# Altium PCB ecg-go_core_backup.PcbDoc
Units mm, origin at the board's own origin, x right, y up, seen from the top; angles counter-clockwise.
Board outline 37 x 40 mm, 2 copper layers (Top Layer, Bottom Layer), stack 1.071 mm thick; 67 components, 67 nets, 243 pads, 69 vias.
Unrouted connection lines stored in the file: 24.
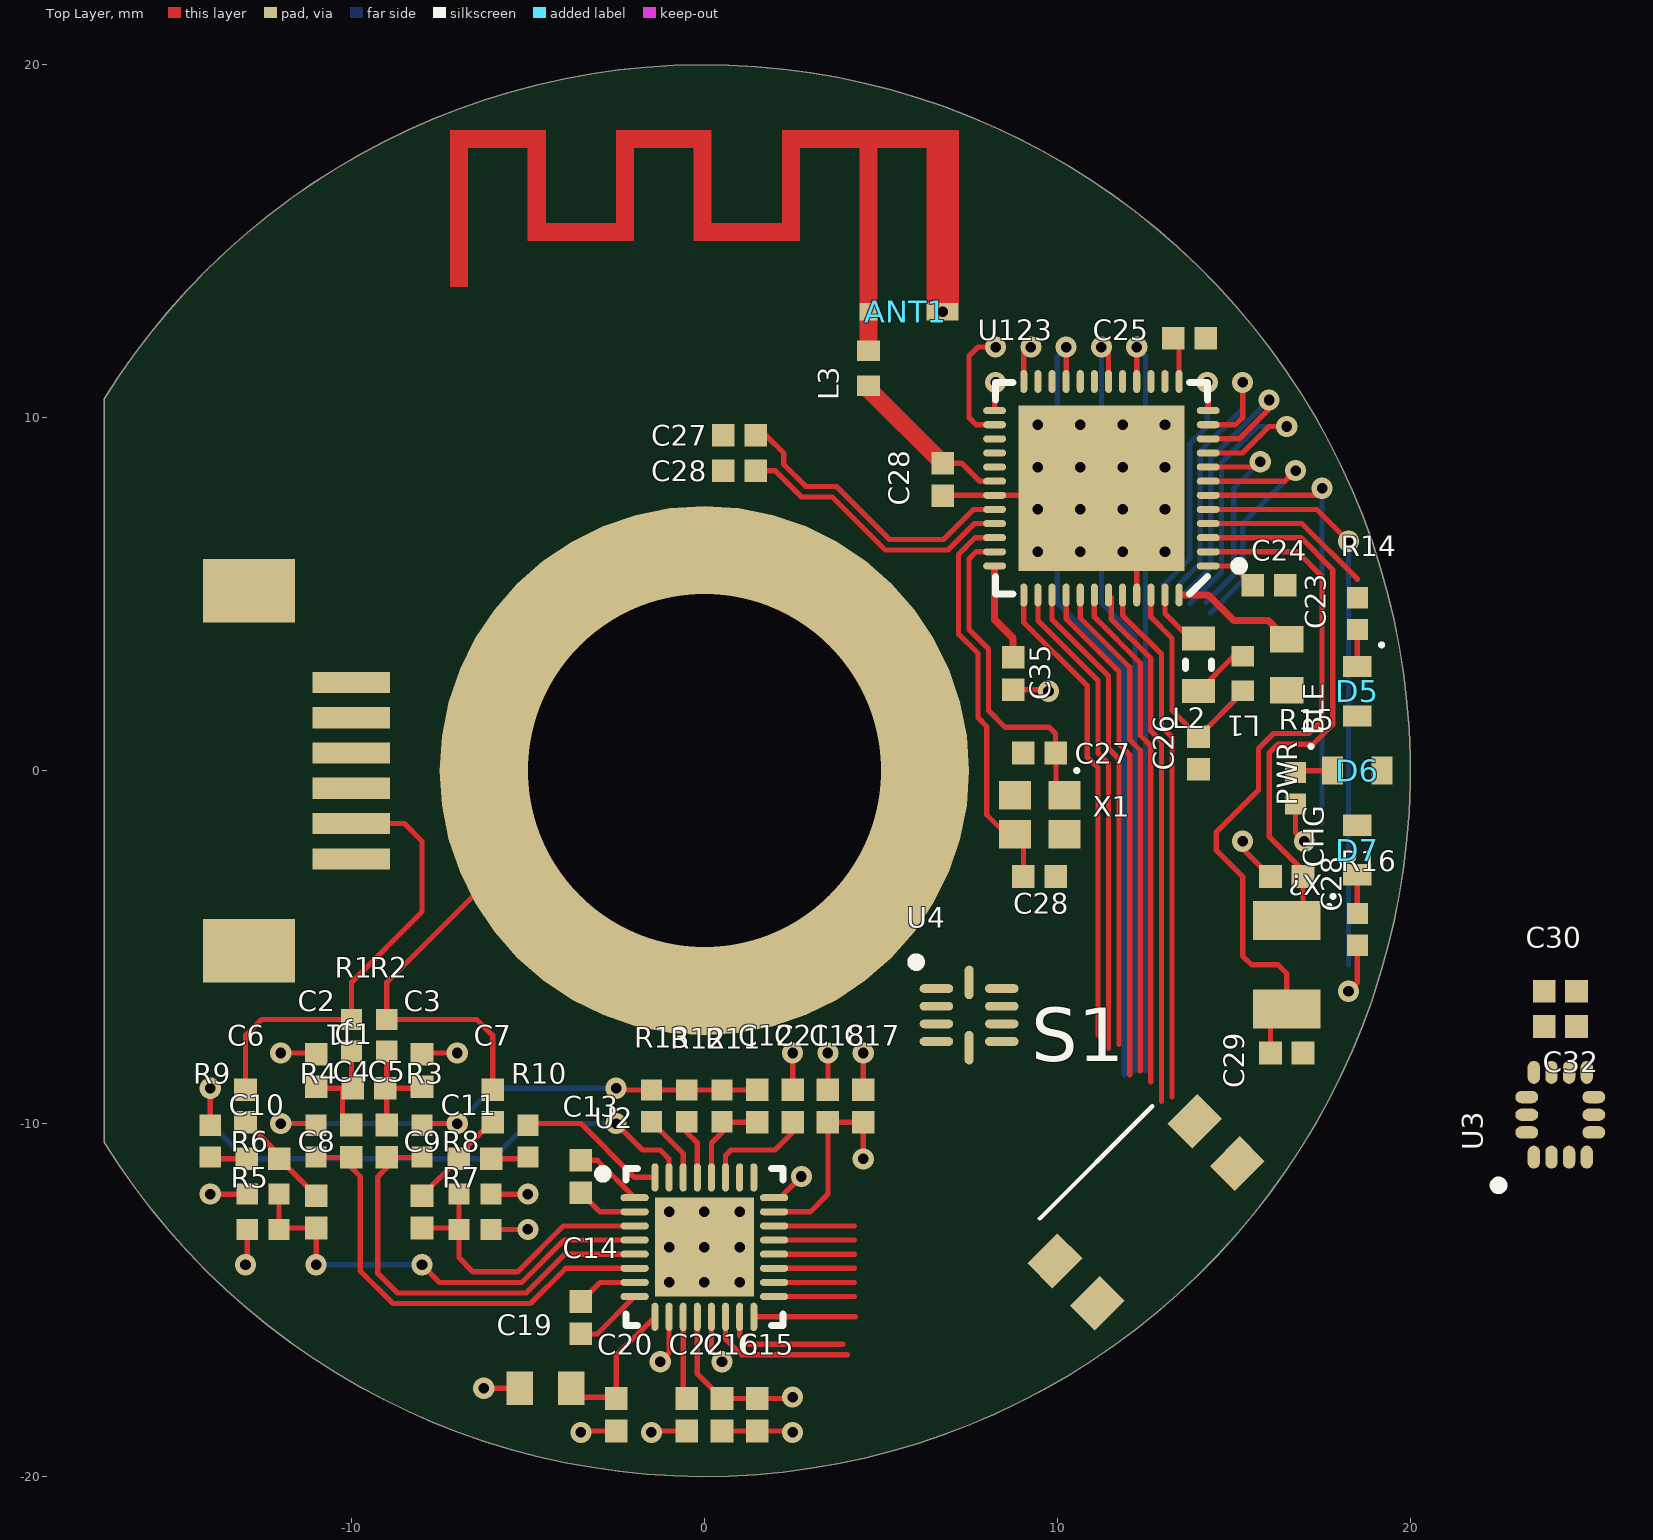
[diagram p0: Top Layer view]
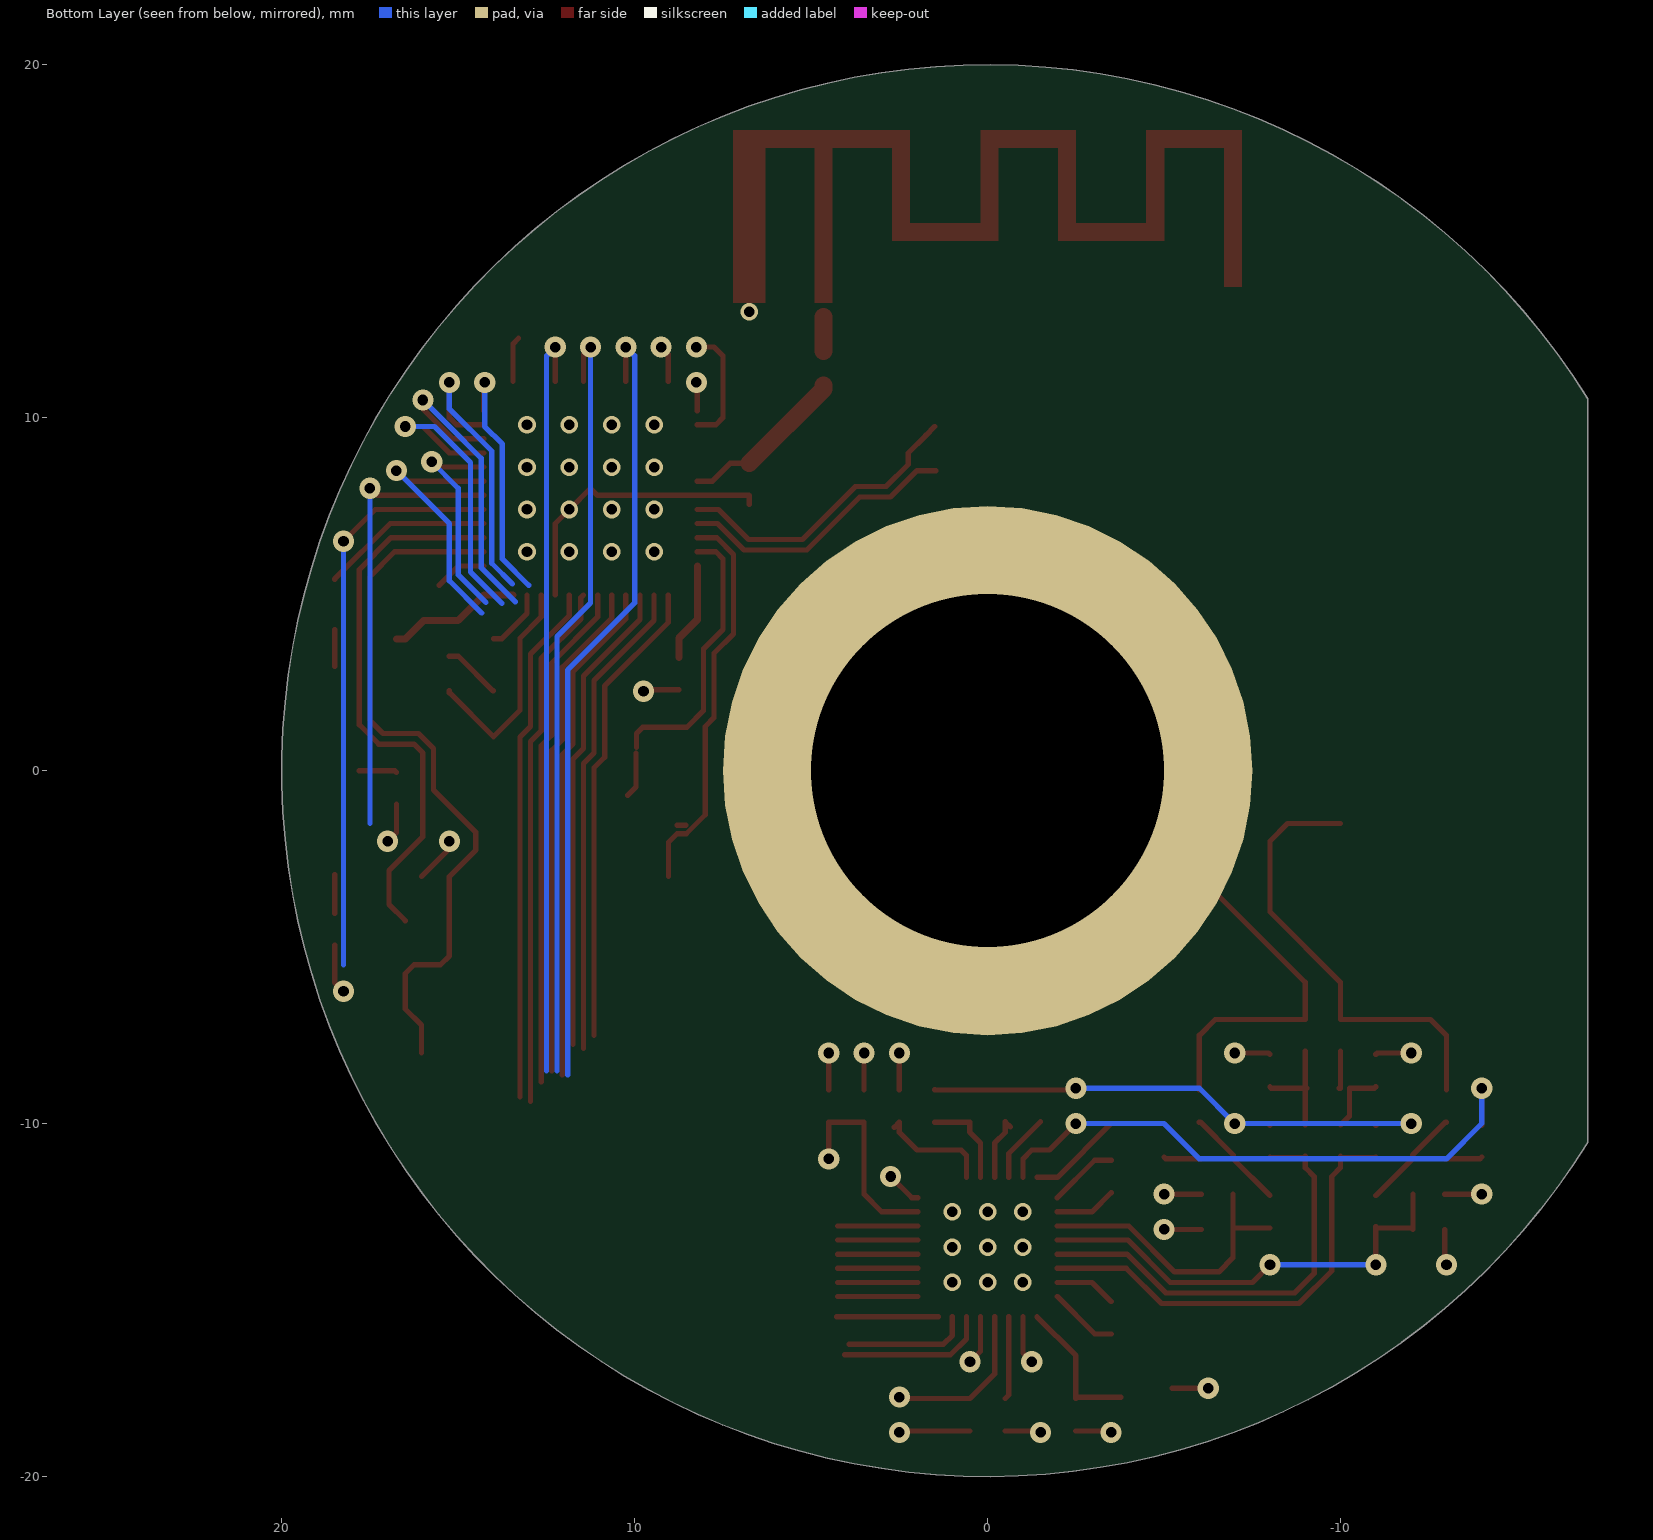
[diagram p1: Bottom Layer view, seen from below]
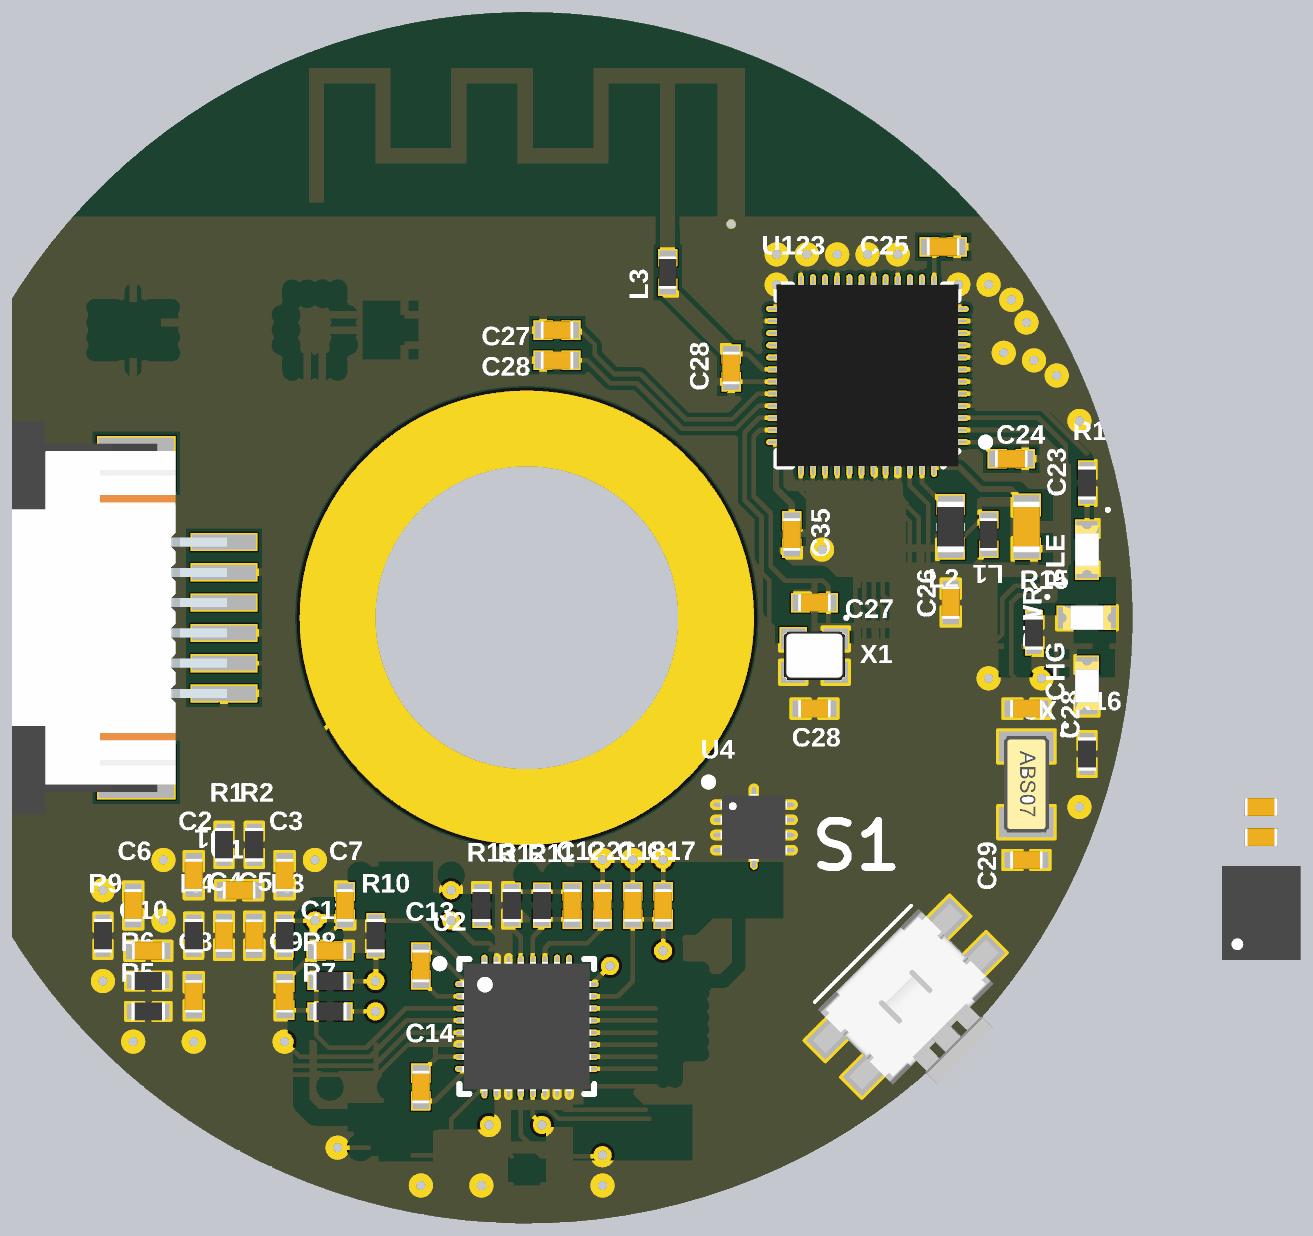
[diagram p2: 3D render of the assembled board from above, using the file's embedded part models]

## Layer stack, top to bottom
Top Solder: solder mask 0.0102, Solder Resist, Dk 3.5
Top Layer: signal copper 0.0356
Dielectric 1: dielectric 1, FR-4, Dk 4.8
Bottom Layer: signal copper 0.0356
Bottom Solder: solder mask 0.0102, Solder Resist, Dk 3.5

## Board outline
-17,-10.536 -17,10.536 cw(c0,0)

## Design rules (kind name [scope] priority, off if disabled: settings)
BoardOutlineClearance [All] p1: gap=0.15
Clearance [All] p1: gap=0.15
ComponentClearance [All] p1: gap=0.25 collisioncheckmode=3 verticalgap=0.25 showdistances=TRUE
HoleSize [All] p1: absolutevalues=TRUE maxlimit=6.3 minlimit=0.3 maxpercent=80.000 minpercent=20.000
ParallelSegment [All] p1: limit=254 gap=0.254
PolygonConnect PolygonConnectANT [HasFootprint('ANT2.4GHZ_MIFA')] p1: connectstyle=Direct reliefconductorwidth=0.254 reliefentries=4 polygonreliefangle="90 Angle" airgapwidth=0.254
PolygonConnect PolygonConnectVias [IsVia] p2: connectstyle=Direct reliefconductorwidth=0.254 reliefentries=4 polygonreliefangle="90 Angle" airgapwidth=0.254
PolygonConnect [All] p3: connectstyle=Relief reliefconductorwidth=0.25 reliefentries=4 polygonreliefangle="90 Angle" airgapwidth=0.15
RoutingVias [All] p1: holewidth=0.3 width=0.6 viastyle="Through Hole" minholewidth=0.3 minwidth=0.6 maxholewidth=6.3 maxwidth=10.6
SolderMaskExpansion [All] p1: expansion=0.1
Width [All] p1: maxlimit=10 minlimit=0.15 preferedwidth=0.25
28 further rules are at their usual default settings.

## Classes and differential pairs
component class U_interface: D5 D6 D7 D? R14 R15 R16 R? S1 U4 U?
component class U_afe: C1 C2 C3 C4 C5 C6 C7 C8 C9 C10 C11 C12 C13 C14 C15 C16 C17 C18 C19 C20 C21 C22 R1 R2 R3 R4 R5 R6 R7 R8 R9 R10 R11 R12 R13 U2
component class U_controller: ANT1 C23 C24 C25 C26 C27 C28 C29 C35 L1 L2 L3 U123 X1 X?
component class U_imu: C30 C32 U3
component class core: J1

## Components (designator, comment, footprint, x,y, rotation, side; value= is the part's Value field where it differs from the comment)
ANT1 "2.4 GHz" ANT2.4GHZ_MIFA 4.65,13.25 r180 top net-tie
C1 "2.2n" C0402 -9.5,-9 r0 top
C2 "100p" C0402 -11,-8.5 r90 top
C3 "100p" C0402 -8,-8.5 r270 top
C4 "1u" C0402 -10,-10.5 r270 top
C5 "1u" C0402 -9,-10.5 r270 top
C6 "0.1u" C0402 -13,-9.5 r90 top
C7 "0.1u" C0402 -6,-9.5 r270 top
C8 "2.2n" C0402 -11,-12.5 r90 top
C9 "2.2n" C0402 -8,-12.5 r90 top
C10 "2.2n" C0402 -12.5,-11 r0 top
C11 "2.2n" C0402 -6.5,-11 r0 top
C12 "1.5n" C0402 1.5,-9.5 r270 top
C13 "4.7n" C0402 -3.5,-11.5 r90 top
C14 "4.7n" C0402 -3.5,-15.5 r90 top
C15 "1u" C0402 1.5,-18.25 r90 top
C16 "0.1u" C0402 0.5,-18.25 r90 top
C17 "1u" C0402 4.5,-9.5 r270 top
C18 "0.1u" C0402 3.5,-9.5 r270 top
C19 "10u" C0603 -4.5,-17.5 r0 top
C20 "0.1u" C0402 -2.5,-18.25 r90 top
C21 "1u" C0402 2.5,-9.5 r270 top
C22 "1u" C0402 -0.5,-18.25 r90 top
C23 "4.7u" C0603 16.5,3 r90 top
C24 "100n" C0402 16,5.25 r180 top
C25 "100n" C0402 13.75,12.25 r180 top
C26 "1u" C0402 14,0.5 r90 top
C27 "12p" C0402 9.5,0.5 r0 top
C27 "100p" C0402 1,9.5 r0 top
C28 "0.8p" C0402 6.75,8.25 r270 top
C28 "12p" C0402 16.5,-3 r0 top
C28 "12p" C0402 9.5,-3 r180 top
C28 "100p" C0402 1,8.5 r0 top
C29 "12p" C0402 16.5,-8 r180 top
C30 "0.1u" C0402 24.25,-6.25 r180 top
C32 "0.1u" C0402 24.25,-7.25 r180 top
C35 "100n" C0402 8.75,2.75 r90 top
D5 "BLE" "WL-SMCW 0603" 18.5,2.25 r270 top
D6 "PWR" "WL-SMCW 0603" 18.5,0 r0 top
D7 "CHG" "WL-SMCW 0603" 18.5,-2.25 r90 top
J1 "FFC Conn" WE68610614122 -17,0 r270 top
L1 "15n" L0402 15.25,2.75 r270 top
L2 "10u" L0603 14,3 r270 top
L3 "3.9n" L0402 4.65,11.4 r90 top
R1 "40.2k" R0402 -10,-7.5 r90 top
R2 "40.2k" R0402 -9,-7.5 r90 top
R3 "4.7M" R0402 -8,-10.5 r270 top
R4 "4.7M" R0402 -11,-10.5 r270 top
R5 "10M" R0402 -12.5,-13 r180 top
R6 "10M" R0402 -12.5,-12 r180 top
R7 "10M" R0402 -6.5,-13 r0 top
R8 "10M" R0402 -6.5,-12 r0 top
R9 "40.2k" R0402 -14,-10.5 r270 top
R10 "40.2k" R0402 -5,-10.5 r270 top
R11 "1M" R0402 0.5,-9.5 r270 top
R12 "0" R0402 -0.5,-9.5 r270 top
R13 "0" R0402 -1.5,-9.5 r90 top
R14 "1k" R0402 18.5,4.45 r270 top
R15 "4.7k" R0402 16.75,-0.5 r90 top
R16 "4.7k" R0402 18.5,-4.5 r90 top
S1 "WE434351045816" WE434351045816 13.75,-13.75 r45 top
U2 "ADS1292R" ADS129X_QFN 0,-13.5 r0 top
U3 "LSM6DS3" LSM6DS3 24.25,-9.75 r90 top
U4 "DRV2603" DRV2603 7.5,-6.925 r0 top
U123 "nRF52832-QFAA" QFN40P600X600X90-48N 11.25,8 r180 top
X1 "32 MHz" CX2016DB32000D0FLJCC 9.5,-1.25 r180 top
X? "32.768 kHz" ABS07-32.768KHZ-9-T 16.5,-5.5 r270 top

## Footprints (in the part's own frame and the unit in brackets; to place one, negate y for a bottom-side part, rotate by r counter-clockwise, add the part's x,y. Pads: shape width x height; smd on the part's side, far side on the other; paste and mask are expansions set on the pad)
ABS07-32.768KHZ-9-T [mm] "Crystal - 32.768 kHz, 9 pF, 70 kOhm"
  rect 1.1x1.9 smd paste-0.05 mask+0.05: 1(-1.25,0) 2(1.25,0)
  silkscreen extent -1.7,1.15 -1.6,1.25, body extent -1.6,-0.75 1.6,0.75, height 0.88
ADS129X_QFN [mm] "QFN, 32-Leads, Body 4,00x4,00mm, Pitch 0,40mm, Thermal Pad 2,80x2,80mm, IPC Medium Density"
  oval 0.8x0.2 smd paste-0.04 mask+0.05: 1(-1.975,1.4) 2(-1.975,1) 3(-1.975,0.6) 4(-1.975,0.2) 5(-1.975,-0.2) 6(-1.975,-0.6) 7(-1.975,-1) 8(-1.975,-1.4) 17(1.975,-1.4) 18(1.975,-1) 19(1.975,-0.6) 20(1.975,-0.2) 21(1.975,0.2) 22(1.975,0.6) 23(1.975,1) 24(1.975,1.4)
  oval 0.2x0.8 smd paste-0.04 mask+0.05: 9(-1.4,-1.975) 10(-1,-1.975) 11(-0.6,-1.975) 12(-0.2,-1.975) 13(0.2,-1.975) 14(0.6,-1.975) 15(1,-1.975) 16(1.4,-1.975) 25(1.4,1.975) 26(1,1.975) 27(0.6,1.975) 28(0.2,1.975) 29(-0.2,1.975) 30(-0.6,1.975) 31(-1,1.975) 32(-1.4,1.975)
  rect 2.8x2.8 smd paste-2.8 mask+0.05: 33(0,0)
  silkscreen extent -3,-2.22 2.22,2.22, body extent -2.12,-2.12 2.12,2.12, height 1
ANT2.4GHZ_MIFA [mm] "Antenna - Meandered Inverted F Antenna (IFA)"
  rect 0.5x0.5 smd paste-0.5: 1(0,0.25)
  rect 0.9x0.5 smd paste-0.9: 2(-2.1,0.25)
  Top Layer region: -2.55,0 -2.55,-4.9 2.45,-4.9 2.45,-2.26 4.45,-2.26 4.45,-4.9 7.15,-4.9 7.15,-2.26 9.15,-2.26 9.15,-4.9 11.85,-4.9 11.85,-0.46 11.35,-0.46 11.35,-4.4 9.65,-4.4 9.65,-1.76 6.65,-1.76 6.65,-4.4 4.95,-4.4 4.95,-1.76 1.95,-1.76 1.95,-4.4 0.25,-4.4 0.25,0 -0.25,0 -0.25,-4.4 -1.65,-4.4 -1.65,0
C0402 [mm] "Chip Capacitor, 2-Leads, Body 1,00x0,50mm, IPC Medium Density"
  rect 0.64x0.64 smd paste-0.05 mask+0.05: 1(-0.46,0) 2(0.46,0)
  body extent -0.55,-0.3 0.55,0.3, height 0.4
C0603 [mm] "Chip Capacitor, 2-Leads, Body 1,60x0,80mm, IPC Medium Density"
  rect 0.75x0.95 smd paste-0.05 mask+0.05: 1(-0.725,0) 2(0.725,0)
  body extent -0.85,-0.45 0.85,0.45, height 0.5
CX2016DB32000D0FLJCC [mm] "Crystal - 32 MHz, 8 pF, 80 ohm"
  rect 0.9x0.8 smd paste-0.05 mask+0.05: 1(-0.7,-0.55) 2(0.7,-0.55) 3(0.7,0.55) 4(-0.7,0.55)
  silkscreen extent -1.1,-1.3 -1,-1.2, body extent -1.02,-0.82 1.03,0.83, height 0.39
DRV2603 [mm] "IC - Haptic Drive, ERM/LRA, Auto Resonance"
  oval 0.95x0.25 smd paste-0.05 mask+0.05: 1(-0.925,0.75) 2(-0.925,0.25) 3(-0.925,-0.25) 4(-0.925,-0.75) 6(0.925,-0.75) 7(0.925,-0.25) 8(0.925,0.25) 9(0.925,0.75)
  oval 0.25x0.95 smd paste-0.05 mask+0.05: 5(0,-0.925) 10(0,0.925)
  silkscreen extent -1.62,1.38 -1.37,1.62, body extent -1.1,-1.1 1.1,1.1, height 0.8
L0402 [mm] "Chip Inductor, 2-Leads, Body 1,00x0,50mm, IPC Medium Density"
  rect 0.58x0.64 smd paste-0.05 mask+0.05: 1(-0.49,0) 2(0.49,0)
  body extent -0.55,-0.3 0.55,0.3, height 0.4
L0603 [mm] "Chip Inductor, 2-Leads, Body 1,60x0,80mm, IPC Medium Density"
  rect 0.68x0.94 smd paste-0.05 mask+0.05: 1(-0.74,0) 2(0.74,0)
  silkscreen extent -0.1,-0.37 0.1,0.37, body extent -0.85,-0.45 0.85,0.45, height 0.5
LSM6DS3 [mm] "IC - Inertial Measurement Unit, Accelerometer, Gyroscope, 6D"
  oval 0.65x0.35 smd paste-0.05 mask+0.025: 1(-1.2,0.75) 2(-1.2,0.25) 3(-1.2,-0.25) 4(-1.2,-0.75) 8(1.2,-0.75) 9(1.2,-0.25) 10(1.2,0.25) 11(1.2,0.75)
  oval 0.35x0.65 smd paste-0.05 mask+0.025: 5(-0.5,-0.95) 6(0,-0.95) 7(0.5,-0.95) 12(0.5,0.95) 13(0,0.95) 14(-0.5,0.95)
  silkscreen extent -2.12,1.63 -1.88,1.87, body extent -1.55,-1.3 1.55,1.3, height 0.86
QFN40P600X600X90-48N [mm]
  oval 0.65x0.2 smd paste-0.05 mask+0.05: 1(-3.025,2.2) 2(-3.025,1.8) 3(-3.025,1.4) 4(-3.025,1) 5(-3.025,0.6) 6(-3.025,0.2) 7(-3.025,-0.2) 8(-3.025,-0.6) 9(-3.025,-1) 10(-3.025,-1.4) 11(-3.025,-1.8) 12(-3.025,-2.2) 25(3.025,-2.2) 26(3.025,-1.8) 27(3.025,-1.4) 28(3.025,-1) 29(3.025,-0.6) 30(3.025,-0.2) 31(3.025,0.2) 32(3.025,0.6) 33(3.025,1) 34(3.025,1.4) 35(3.025,1.8) 36(3.025,2.2)
  oval 0.2x0.65 smd paste-0.05 mask+0.05: 13(-2.2,-3.025) 14(-1.8,-3.025) 15(-1.4,-3.025) 16(-1,-3.025) 17(-0.6,-3.025) 18(-0.2,-3.025) 19(0.2,-3.025) 20(0.6,-3.025) 21(1,-3.025) 22(1.4,-3.025) 23(1.8,-3.025) 24(2.2,-3.025) 37(2.2,3.025) 38(1.8,3.025) 39(1.4,3.025) 40(1,3.025) 41(0.6,3.025) 42(0.2,3.025) 43(-0.2,3.025) 44(-0.6,3.025) 45(-1,3.025) 46(-1.4,3.025) 47(-1.8,3.025) 48(-2.2,3.025)
  rect 4.7x4.7 smd paste-0.05 mask+0.05: 49(0,0)
  silkscreen extent -4.03,-3 3,3, body extent -3.02,-3.02 3.02,3.02, height 0.86
R0402 [mm] "Chip Resistor, 2-Leads, Body 1,00x0,50mm, IPC Medium Density"
  rect 0.6x0.6 smd paste-0.05 mask+0.05: 1(-0.45,0) 2(0.45,0)
  body extent -0.55,-0.3 0.55,0.3, height 0.4
WE68610614122 [mm] "Conn - FFC, 6 Pin, Top Contacts, SMD, Right Angle, Slide Lock"
  rect 0.6x2.2 smd paste-0.05 mask+0.05: 1(-2.5,7) 2(-1.5,7) 3(-0.5,7) 4(0.5,7) 5(1.5,7) 6(2.5,7)
  rect 1.8x2.6 smd paste-0.05 mask+0.05: ""(-5.1,4.1) ""(5.1,4.1)
  body extent -6.5,0 6.5,7.1, height 3.01
WE434351045816 [mm] "Switch - Tactile, Off-Mom, SPST, Side-Actuated"
  rect 1.2x1 smd paste-0.05 mask+0.05: 1(2.8,2.6) 2(2.8,0.9) 3(-2.8,2.6) 4(-2.8,0.9)
  silkscreen extent -2.25,3.75 2.25,3.75, body extent -3.2,-1 3.2,3.5, height 1.64
"WL-SMCW 0603" [mm] "Chip Diode, 2-Leads, Body 1,60x0,80mm, IPC Medium Density"
  rect 0.6x0.8 smd paste-0.05 mask+0.05: 1(-0.7,0) 2(0.7,0)
  silkscreen extent -1.36,0.64 -1.26,0.74, body extent -0.8,-0.4 0.8,0.4, height 0.7

## Part data
ANT1: library part "Antenna 2.4 GHz", "Antenna - Meandered Inverted F Antenna (IFA)"
C1 C2 C3 C4 C5 C6 C7 C8 C9 C10 C11 C12 C13 C14 C15 C16 C17 C18 C19 C20 C21 C22 C23 C24 C25 C26 C27 C27 C28 C28 C28 C28 C29 C30 C32 C35: library part Capacitor, "Capacitor"
D5: library part 150060BS75000, "LED - Blue, 3.2V, 0603"
D6: library part 150060VS75000, "LED - Green, 2V, 0603"
D7: library part 150060YS75000, "LED - Yellow, 2V, 0603"
J1: library part WE68610614122, "Conn - FFC, 6 Pin, Top Contacts, SMD, Right Angle, Slide Lock"
L1 L2 L3: library part Inductor, "Inductor"
R1 R2 R3 R4 R5 R6 R7 R8 R9 R10 R11 R12 R13 R14 R15 R16: library part Resistor, "Resistor"
S1: "Switch - Tactile, Off-Mom, SPST, Side-Actuated"
U2: "IC - Analog Front End - Medical"
U3: "IC - Inertial Measurement Unit, Accelerometer, Gyroscope, 6D"
U4: "IC - Haptic Drive, ERM/LRA, Auto Resonance"
U123: "Multi-protocol Bluetooth Low Energy, ANT and 2.4GHz proprietary system-on-chip"
X1: library part CX2016DB32000D0FLJCC, "Crystal - 32 MHz, 8 pF, 80 ohm"
X?: library part ABS07-32.768KHZ-9-T, "Crystal - 32.768 kHz, 9 pF, 70 kOhm"

## Free pads (board coordinates)
  round 15 hole 10: ""(0,0)

## Via types
v1: diameter 0.6, hole 0.3, Top Layer to Bottom Layer, 43 vias
v2: diameter 0.5, hole 0.3, Top Layer to Bottom Layer, 25 vias
v3: diameter 0.5, hole 0.3, Top Layer to Bottom Layer, tented both sides, 1 vias

## Nets (pads, with @x,y where several pads share a name; then routed paths per layer and width w, separated by ;. In a path a pad name is that pad's centre, name@x,y a point inside that pad or via, vN(x,y) a via of type N, cw(c..) or ccw(c..) an arc to the next point about the centre after c; other vN are vias at no path point)
AFE_CLK: U2.17 | length 2.3
  Top Layer w0.15: U2.17 4.25,-14.9
AFE_CLKSEL: U2.14 | length 4.3
  Top Layer w0.15: U2.14 0.6,-16.1 1.05,-16.55 4.049,-16.55
AFE_CS: U2.18 | length 2.3
  Top Layer w0.15: U2.18 4.25,-14.5
AFE_DIN: U2.19 | length 2.3
  Top Layer w0.15: U2.19 4.25,-14.1
AFE_DOUT: U2.21 | length 2.3
  Top Layer w0.15: U2.21 4.25,-13.3
AFE_DRDY: U2.22 | length 2.3
  Top Layer w0.15: U2.22 4.25,-12.9
AFE_ECG_BIAS: C12.1 R3.1 R4.1 R11.1 R12.1 R13.2 | length 16
  Top Layer w0.15: v1(-12,-10) -11.05,-10 R4.1 ; R3.1 -7.95,-10 v1(-7,-10) ; v1(-2.5,-9) -2.45,-9.05 R13.2 R12.1 R11.1 1.49,-9.05 C12.1
  Bottom Layer w0.15: v1(-12,-10) v1(-7,-10) -6,-9 v1(-2.5,-9)
AFE_ELEC_LA: C7.1 pad. R2.2 | length 17.2
  Top Layer w0.15: R2.2 -6.45,-7.05 -6,-7.5 C7.1 ; R2.2@-9,-7.01 -9,-6 -3,0 pad.
AFE_ELEC_RA: C6.2 J1.5 R1.2 | length 12.8
  Top Layer w0.15: C6.2 -13,-7.5 -12.55,-7.05 R1.2 ; R1.2@-10,-7.01 -10,-6 -8,-4 -8,-2 -8.5,-1.5 J1.5
AFE_GPIO1: U2.26
AFE_GPIO2: U2.25
AFE_RESET: U2.15 | length 3.6
  Top Layer w0.15: U2.15 1,-16 1.25,-16.25 3.924,-16.25
AFE_RESP_BIAS_N: C9.1 R7.1 R8.1 U2.3 | length 8.5
  Top Layer w0.15: C9.1 -6.99,-12.96 R7.1 ; R8.1 R7.1 ; U2.3 -3.999,-12.9 -5.299,-14.2 -6.55,-14.2 -6.95,-13.8 R7.1
AFE_RESP_BIAS_P: C8.1 R5.1 R6.1 U2.4 | length 12.9
  Top Layer w0.15: R6.1 R5.1 -12.01,-12.96 C8.1 ; v1(-11,-14) C8.1 ; C8.1@-11,-12.92 C8.1 ; v1(-8,-14) -7.5,-14.5 -5.174,-14.5 -3.974,-13.3 U2.4
  Bottom Layer w0.15: v1(-11,-14) v1(-8,-14)
AFE_SCLK: U2.20 | length 2.3
  Top Layer w0.15: U2.20 4.25,-13.7
AFE_START: U2.16 | length 2.9
  Top Layer w0.15: U2.16 4.275,-15.475
AFE_VCAP1: C22.2 U2.11 | length 2.4
  Top Layer w0.15: U2.11 -0.6,-17.69 C22.2
AFE_VCAP2: C21.2 U2.27 | length 3.3
  Top Layer w0.15: U2.27 0.6,-10.9 0.75,-10.75 2,-10.75 2.5,-10.25 C21.2 C21.2@2.645,-10.105
AFE_VREFP: C19.2 C20.2 U2.9 | length 4.1
  Top Layer w0.15: C19.2@-3.775,-17.75 -2.54,-17.75 C20.2 -2.5,-16.575 U2.9
AGND: C2.2 C3.1 C15.1 C16.1 C17.1 C18.1 C19.1 C20.1 C21.1 C22.1 R6.2 R8.2 U2.10 U2.13 U2.24 | length 16.1
  Top Layer w0.15: v1(-14,-12) R6.2 ; v1(-12,-8) -11.04,-8 C2.2 ; C3.1 -7.96,-8 v1(-7,-8) ; v1(-6.25,-17.5) C19.1 ; R8.2 v1(-5,-12) ; v1(-3.5,-18.75) -3.46,-18.71 C20.1 ; v1(-1.5,-18.75) -1.46,-18.71 C22.1 ; v1(-1.25,-16.75) -1,-16.5 U2.10 ; U2.13 0.2,-16.45 v1(0.5,-16.75) ; C16.1 C15.1 2.46,-18.71 v1(2.5,-18.75) ; U2.24 2.15,-12.1 v1(2.75,-11.5) ; C21.1 v1(2.5,-8) ; C18.1 v1(3.5,-8) ; C17.1 v1(4.5,-8)
CTRL_ANT_FEED: ANT1.1 L3.2 | length 1
  Top Layer w0.5: L3.2 ANT1.1@4.65,12.85
CTRL_CHRG_STAT: J1.3
CTRL_DCC: L2.1 U123.47 | length 1.8
  Top Layer w0.15: U123.47 13.05,4.45 13.76,3.74 L2.1
CTRL_DEC1: C24.2 U123.1 | length 1.5
  Top Layer w0.15: U123.1 14.99,5.8 C24.2
CTRL_DEC2: C27.2@1.46,9.5 U123.32 | length 8.6
  Top Layer w0.15: C27.2@1.5,9.75 1.75,9.5 2.25,9 2.25,8.674 2.874,8.05 3.749,8.05 5.25,6.549 6.776,6.549 7.627,7.4 U123.32
CTRL_DEC3: C28.2@1.46,8.5 U123.33 | length 8
  Top Layer w0.15: C28.2@1.46,8.5 2,8.5 2.75,7.75 3.624,7.75 5.126,6.249 6.9,6.249 7.651,7 U123.33
CTRL_DEC4: C26.2 L1.2 U123.46 | length 6.4
  Top Layer w0.15: U123.46 12.65,4.35 13.25,3.75 13.25,1.71 C26.2 15.25,2.21 L1.2
CTRL_SWDCLK: U123.25 | length 0.8
  Top Layer w0.15: U123.25 8.225,10.975 v1(8.25,11)
CTRL_SWDIO: U123.26 | length 3.4
  Top Layer w0.15: U123.26 7.7,9.8 7.5,10 7.5,11.75 7.75,12 v1(8.25,12)
CTRL_XC1: C28.2@9.04,-3 U123.34 X1.3 | length 11.5
  Top Layer w0.15: U123.34 7.676,6.6 7.2,6.124 7.2,3.876 7.75,3.326 7.75,1.5 8,1.25 8,-1.25 8.54,-1.79 8.8,-1.79 9.04,-2.03 C28.2@9.04,-3 ; X1.3@8.55,-1.55 X1.3@8.8,-1.55
CTRL_XC2: C27.2@9.96,0.5 U123.35 X1.1 | length 9.2
  Top Layer w0.15: U123.35 7.7,6.2 7.5,6 7.5,4 8.05,3.45 8.05,1.7 8.525,1.225 9.775,1.225 9.95,1.05 C27.2@9.95,0.655 ; C27.2@9.96,0.5 9.96,-0.46 X1.1
CTRL_XL1: C29.2 U123.2 X?.2 | length 20.3
  Top Layer w0.15: U123.2 16.8,6.2 17.5,5.5 17.5,1.424 17.126,1.05 16.126,1.05 15.7,0.624 15.7,-0.55 14.5,-1.75 14.5,-2.25 15.25,-3 15.25,-5.25 15.5,-5.5 16.25,-5.5 16.5,-5.75 X?.2 16.04,-7.21 C29.2
CTRL_XL2: C28.2@16.96,-3 U123.3 X?.1 | length 15.8
  Top Layer w0.15: U123.3 16.9,6.6 17.8,5.7 17.8,1.3 17.25,0.75 16.25,0.75 16,0.5 16,-1.87 16.96,-2.83 16.96,-3 16.96,-3.79 X?.1
GND: ANT1.2 C23.1 C24.1 C25.1 C26.1 C27.1 C28.1@0.54,8.5 C28.1@9.96,-3 C28.1@16.04,-3 C28.2@6.75,7.79 C29.1 C30.1 C32.1 C35.1 J1.2 J1.4 J1.6 S1.1 S1.3 U3.2 U3.3 U3.6 U3.7 U4.5 U4.8 U4.10 U123.31 U123.45 U123.49 X1.2 X1.4 | length 10.6
  Top Layer w0.15: C28.2@6.75,7.54 6.75,7.79 6.76,7.8 U123.31 11.05,7.8 U123.49 v2(11.85,7.4) 12.25,7 U123.45 ; C35.1 9.71,2.29 v1(9.75,2.25) ; v1(15.25,-2) 15.25,-2.21 C28.1@16.04,-3
  other v2: 9.45,6.2 10.65,6.2 11.85,6.2 13.05,6.2 9.45,7.4 10.65,7.4 13.05,7.4 9.45,8.6 10.65,8.6 11.85,8.6 13.05,8.6 9.45,9.8 10.65,9.8 11.85,9.8 13.05,9.8
  other v3: 6.75,13
IMU_INT1: U3.4
IMU_INT2: U3.9
NetC1_1: C1.1 C2.1 C4.1 R1.1 | length 3
  Top Layer w0.15: C2.1 -10.96,-9 -10.25,-9 -10.25,-9.79 C4.1 ; R1.1 -10,-9 C1.1
NetC1_2: C1.2 C3.2 C5.1 R2.1 | length 3.2
  Top Layer w0.15: C5.1 -9,-9.04 C1.2 ; R2.1 -9,-8.96 C1.2 ; C3.2 -8.04,-9 C1.2
NetC4_2: C4.2 R4.2 U2.6 | length 12.9
  Top Layer w0.15: R4.2 -10.99,-10.96 C4.2 ; C4.2@-10,-10.92 C4.2 ; U2.6 -3.926,-14.1 -4.926,-15.1 -8.824,-15.1 -9.75,-14.174 -9.75,-11.5 -10,-11.25 C4.2
NetC5_2: C5.2 R3.2 U2.5 | length 12.4
  Top Layer w0.15: C5.2@-9,-10.92 C5.2 ; R3.2 -8.01,-10.96 C5.2 ; U2.5 -3.95,-13.7 -5.05,-14.8 -8.7,-14.8 -9.25,-14.25 -9.25,-11.5 -9,-11.25 C5.2
NetC6_1: C6.1 C8.2 C10.2 | length 2.9
  Top Layer w0.15: C6.1 -12.971,-9.96 -12.04,-10.891 C10.2 C8.2
NetC7_2: C7.2 C9.2 C11.1 | length 2.9
  Top Layer w0.15: C9.2 C11.1 -6.96,-10.891 -6.029,-9.96 C7.2
NetC10_1: C10.1 R9.2 | length 1.1
  Top Layer w0.15: R9.2 -13.95,-11 C10.1
NetC11_2: C11.2 R10.2 | length 1.1
  Top Layer w0.15: C11.2 -5.05,-11 R10.2
NetC12_2: C12.2 R11.2 U2.28 | length 2.7
  Top Layer w0.15: U2.28 0.2,-10.55 0.51,-10.24 0.51,-9.96 C12.2
NetC13_1: C13.1 U2.2 | length 1.7
  Top Layer w0.15: C13.1 -2.96,-12.5 U2.2
NetC13_2: C13.2 U2.1 | length 2
  Top Layer w0.15: C13.2 -3.035,-11.04 U2.1
NetC14_1: C14.1 U2.8 | length 2
  Top Layer w0.15: C14.1 -3.035,-15.96 U2.8
NetC14_2: C14.2 U2.7 | length 1.7
  Top Layer w0.15: C14.2 -2.96,-14.5 U2.7
NetC23_2: C23.2 U123.48 | length 3.8
  Top Layer w0.2: U123.48 14.275,4.975 15,4.25 15.975,4.25 C23.2 C23.2@16.75,3.725
NetC25_2: C25.2 U123.13 | length 1.3
  Top Layer w0.15: C25.2 13.45,12.09 U123.13
NetC28_1: C28.1@6.75,8.71 L3.1 U123.30 | length 4.8
  Top Layer w0.15: C28.1@6.75,8.71 7.29,8.71 7.8,8.2 U123.30
  Top Layer w0.5: L3.1 4.65,10.81 C28.1@6.75,8.71
NetC30_2: C30.2 U3.8
NetC32_2: C32.2 U3.5
NetC35_2: C35.2 U123.36 | length 2.8
  Top Layer w0.2: U123.36 8.225,4.275 8.75,3.75 C35.2
NetD5_1: D5.1 R14.2 | length 1
  Top Layer w0.15: D5.1 R14.2
NetD6_1: D6.1 R15.2 | length 1.1
  Top Layer w0.15: R15.2 16.8,0 D6.1
NetD7_1: D7.1 R16.2 | length 1.1
  Top Layer w0.15: R16.2 D7.1
NetL1_1: L1.1 L2.2 | length 1.7
  Top Layer w0.15: L2.2 14.01,2.26 14.99,3.24 L1.1
NetR9_1: R9.1 U2.31 | length 16.8
  Top Layer w0.15: R9.1 v1(-14,-9) ; v1(-2.5,-10) -1.75,-10.75 -1.25,-10.75 -1,-11 U2.31
  Bottom Layer w0.15: v1(-14,-9) -14,-10 -13,-11 -6,-11 -5,-10 v1(-2.5,-10)
NetR10_1: R10.1 U2.32 | length 4.2
  Top Layer w0.15: R10.1@-5,-10.01 -4.99,-10 -3.5,-10 -1.975,-11.525 U2.32
NetR12_2: R12.2 U2.29 | length 1.9
  Top Layer w0.15: R12.2@-0.65,-10.1 R12.2 -0.5,-10.25 -0.2,-10.55 U2.29
NetR13_1: R13.1 U2.30 | length 1.9
  Top Layer w0.15: R13.1 -0.6,-10.85 U2.30
NetS1_2: S1.2 S1.4
VBATT: J1.1
VDD_AFE_A: C15.2 C16.2 R5.2 R7.2 U2.12 | length 6.7
  Top Layer w0.15: v1(-13,-14) -12.95,-13.95 R5.2 ; R7.2 v1(-5,-13) ; U2.12 -0.2,-17.09 C16.2 C15.2 2.46,-17.79 v1(2.5,-17.75)
VDD_AFE_D: C17.2 C18.2 U2.23 | length 5.8
  Top Layer w0.15: U2.23 3,-12.5 3.5,-12 C18.2 C17.2 v1(4.5,-11)
pads on no net: D5.2 D6.2 D7.2 J1. R14.1 R15.1 R16.1 U2.33 U3.1 U3.10 U3.11 U3.12 U3.13 U3.14 U4.1 U4.2 U4.3 U4.4 U4.6 U4.7 U4.9 U123.4 U123.5 U123.6 U123.7 U123.8 U123.9 U123.10 U123.11 U123.12 U123.14 U123.15 U123.16 U123.17 U123.18 U123.19 U123.20 U123.21 U123.22 U123.23 U123.24 U123.27 U123.28 U123.29 U123.37 U123.38 U123.39 U123.40 U123.41 U123.42 U123.43 U123.44
copper on no net: | length 264.6
  Top Layer w0.15: 9.05,4.975 9.05,4.2 10.85,2.4 10.85,0.38 11.15,0.08 11.15,-6.5 11.15,-7.5 ; 9.05,11.025 9.05,11.8 v1(9.25,12) ; 9.45,4.975 9.45,4.254 11.038,2.667 11.15,2.554 11.15,0.504 11.45,0.204 11.45,-7.874 ; 9.85,4.975 9.85,4.279 11.45,2.679 11.45,0.629 11.75,0.329 11.75,-7.75 ; 10.25,4.975 10.25,4.303 11.75,2.803 11.75,0.753 12.05,0.453 12.05,-8.624 ; 10.25,11.025 v1(10.25,12) ; 10.65,4.975 10.65,4.327 12.05,2.927 12.05,0.877 12.35,0.577 12.35,-8.5 ; 11.05,4.975 11.05,4.351 12.35,3.051 12.35,1.001 12.65,0.701 12.65,-7 12.65,-8.812 ; v1(11.25,12) 11.45,11.8 11.45,11.025 ; 11.45,4.975 11.525,4.9 11.525,4.301 12.65,3.176 12.65,1.126 12.95,0.826 12.95,-8.25 12.95,-9.374 ; 11.85,4.975 11.85,4.4 12.95,3.3 12.95,1.25 13.25,0.95 13.25,-8.75 13.25,-9.25 ; 12.25,11.025 v1(12.25,12) ; v1(14.25,11) 14.275,10.975 14.275,10.2 ; 14.275,7 16.925,7 18.5,5.425 ; 14.275,7.4 17.35,7.4 v1(18.25,6.5) ; 14.275,7.8 17.3,7.8 v1(17.5,8) ; 14.275,8.2 16.45,8.2 v1(16.75,8.5) ; 14.275,8.6 15.6,8.6 v1(15.75,8.75) ; 14.275,9 15.25,9 16,9.75 v1(16.5,9.75) ; 14.275,9.4 15.15,9.4 16,10.25 v1(16,10.5) ; 14.275,9.8 15.05,9.8 15.25,10 v1(15.25,11) ; 16.75,-0.95 16.75,-1.5 16.75,-1.75 v1(17,-2) ; v1(18.25,-6.25) 18.5,-6 18.5,-4.95
  Bottom Layer w0.15: v1(10.25,12) 10,11.75 10,4.75 11.25,3.5 11.9,2.85 11.9,-8.624 ; v1(11.25,12) 11.25,4.75 11.462,4.538 12.2,3.8 12.2,-7.25 12.2,-8.5 ; v1(12.25,12) 12.5,11.75 12.5,5.75 12.5,-8.5 ; 13,5.25 13.75,6 13.75,9.25 14.25,9.75 v1(14.25,11) ; 13.386,4.788 14.35,5.751 14.35,8.85 15.25,9.75 v1(16,10.5) ; 13.462,5.288 14.05,5.876 14.05,9.05 15.25,10.25 v1(15.25,11) ; 13.761,4.739 14.65,5.627 14.65,8.726 15.374,9.45 15.674,9.75 v1(16.5,9.75) ; 14.212,4.765 15,5.553 15,8 v1(15.75,8.75) ; 14.336,4.465 15.25,5.379 15.25,7 v1(16.75,8.5) ; 17.5,-1.5 v1(17.5,8) ; 18.25,-5.5 v1(18.25,6.5)
  other v2: -1,-14.5 0,-14.5 1,-14.5 -1,-13.5 0,-13.5 1,-13.5 -1,-12.5 0,-12.5 1,-12.5

## Polygon pours and split planes (outlines as drawn)
GND on Top Layer "TOP_GND" (solid, shelved, pour order 0): -17,-10.536 -17,10.536 cw(c0,0)

## Other copper
Top Layer:
  pour cut-out: 20,13.25 20,20 -17.5,20 -17.5,13.25

## Silkscreen, mask and mechanical layers (free items; w line width, h text height)
Mechanical 1:
  the board outline again, w0.25